# EAGLE board ac_dc (EAGLE 6.2)
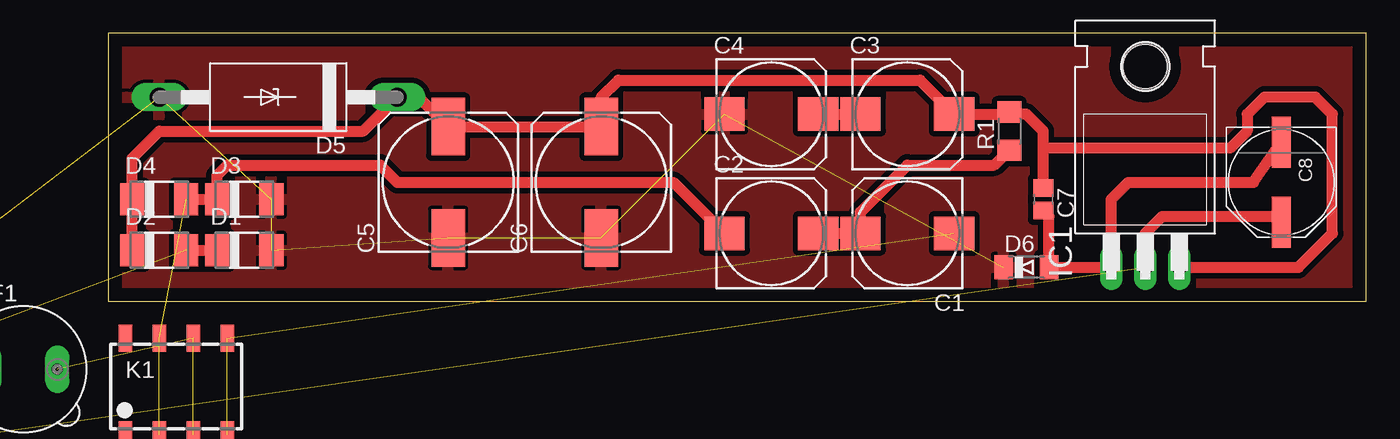
[diagram p0: board, top side]

Size 93.96 x 20 mm. Coordinates in mm from the lower left corner, seen from the top.
Outline: 0,0 93.96,0 93.96,20 0,20 0,0
Copper layers (1*16): Top 0.035mm / dielectric 1.5mm / Bottom 0.035mm
Design rules: minimum track width 10mil, minimum drill 24mil, track to track 8mil, track to pad 8mil, pad to pad 8mil, via to via 8mil, smd to smd 8mil, copper to edge 40mil, drill to drill 8mil, minimum pad ring 10mil, minimum via ring 8mil, stop-mask expansion 4mil, vias tented up to drill 0mil, thermal gap 10mil

## Footprints (pad centres in the part's own frame; a part is rotated, then mirrored left to right if it is on the bottom)
175TMP-0808 = smd 3 x 2.5: + 3.5,0; - -3.5,0
153CLV-1014 = smd 4.3 x 2.5: + 4.15,0; - -4.15,0
C0805 = smd 1.3 x 1.5: 1 -0.85,0; 2 0.85,0
PANASONIC_E = smd 3.8 x 1.4: + 3,0; - -3,0
C1206 = smd 1.6 x 1.8: 1 -1.4,0; 2 1.4,0
DO-214AC = smd 1.8 x 2.4: A 2.025,0; C -2.025,0
CB429-17 = drill 1.397 long: A 8.89,0; C -8.89,0
MINIMELF = smd 1.4 x 1.8: A 1.7,0; C -1.7,0
19560 = drill 0.813 pad 1.778 long: 1 -2.54,0; 2 2.54,0
TO220H = drill 1.118 long: 1 -2.54,-10.16; 2 0,-10.16; 3 2.54,-10.16 | hole 3.302: 0,4.826
TQFP32-08 = smd 1.27 x 0.559: 1 -4.293,2.8; 2 -4.293,2; 3 -4.293,1.2; 4 -4.293,0.4; 5 -4.293,-0.4; 6 -4.293,-1.2; 7 -4.293,-2; 8 -4.293,-2.8; 17 4.293,-2.8; 18 4.293,-2; 19 4.293,-1.2; 20 4.293,-0.4; 21 4.293,0.4; 22 4.293,1.2; 23 4.293,2; 24 4.293,2.8 | smd 0.559 x 1.27: 9 -2.8,-4.293; 10 -2,-4.293; 11 -1.2,-4.293; 12 -0.4,-4.293; 13 0.4,-4.293; 14 1.2,-4.293; 15 2,-4.293; 16 2.8,-4.293; 25 2.8,4.293; 26 2,4.293; 27 1.2,4.293; 28 0.4,4.293; 29 -0.4,4.293; 30 -1.2,4.293; 31 -2,4.293; 32 -2.8,4.293
6410-02 = drill 1.016 long: 1 1.27,0; 2 -1.27,0
G6K-2F = smd 1 x 2: 1 -3.81,-3.6; 2 -1.27,-3.6; 3 1.27,-3.6; 4 3.81,-3.6; 5 3.81,3.6; 6 1.27,3.6; 7 -1.27,3.6; 8 -3.81,3.6
R1206 = smd 1.6 x 1.803: 1 -1.422,0; 2 1.422,0
SOT23-DBV = smd 0.55 x 1.2: 1 -0.95,-1.3; 2 0,-1.3; 3 0.95,-1.3; 4 0.95,1.3; 5 -0.95,1.3

## Placement (x,y rotation side)
C1  82µ  [175TMP-0808]  59.69,5.08 180 top
C2  82µ  [175TMP-0808]  49.53,5.08 0 top
C3  82µ  [175TMP-0808]  59.69,13.97 0 top
C4  82µ  [175TMP-0808]  49.53,13.97 0 top
C5  470µ  [153CLV-1014]  25.4,8.89 90 top
C6  470µ  [153CLV-1014]  36.83,8.89 90 top
C7  220n  [C0805]  69.85,7.62 270 top
C8  100u  [PANASONIC_E]  87.63,8.89 270 top
C9  100n  [C0805]  -38.1,-22.86 0 top  (outside the outline)
C10  100n  [C0805]  -38.1,-26.67 0 top  (outside the outline)
C11  10u  [C1206]  -36.83,-31.75 0 top  (outside the outline)
D1  [DO-214AC]  10.16,3.81 0 top
D2  [DO-214AC]  3.81,3.81 0 top
D3  [DO-214AC]  10.16,7.62 0 top
D4  [DO-214AC]  3.81,7.62 0 top
D5  15KEXXC  [CB429-17]  12.7,15.24 180 top
D6  [MINIMELF]  68.58,2.54 0 top
F1  FUSE19560  [19560]  -6.35,-5.08 0 top  (outside the outline)
IC1  317T  [TO220H]  77.47,12.7 0 top
IC2  MEGA48/88/168-AU  [TQFP32-08]  -26.67,-5.08 0 top  (outside the outline)
J1  22-27-2021-02  [6410-02]  -16.51,-5.08 0 top  (outside the outline)
K1  G6K-2F  [G6K-2F]  5.08,-6.35 0 top
R1  [R1206]  67.31,12.7 90 top
U$1  TPS71530  [SOT23-DBV]  -38.1,-15.24 0 top  (outside the outline)

## Library data of the parts
C1-C11 R1 = resistor
D1-D6 = diode
F1 = fuse; MPN: 56000001009; OC_FARNELL: 1185363; OC_NEWARK: 98K6125
IC1 = linear
IC2 = avr-7
J1 = con-molex; OC_FARNELL: unknown; OC_NEWARK: unknown
K1 = relay; MF: OMRON COMPONENTS USA; MPN: G6K-2F DC24; OC_FARNELL: 1690427; OC_NEWARK: 36K7467
U$1 = ShortCircuitRobotics

## Nets
+12V: C8.+ IC1.2 U$1.4
GND: C4.- C5.- C6.- C9.2 C10.2 C11.2 D1.A D3.A D5.A D6.C IC2.3 IC2.5 IC2.21 U$1.2
N$1: C3.- C4.+
N$2: C2.- D3.C D4.A K1.2 K1.7
N$3: C1.+ C2.+ R1.1
N$4: D1.C D2.A J1.2
N$5: C3.+ C5.+ C6.+ C7.1 D2.C D4.C D5.C IC1.3 R1.2
N$6: C1.- K1.4 K1.5
N$8: F1.2 K1.3 K1.6
N$9: F1.1 J1.1
N$10: C7.2 C8.- D6.A IC1.1
VCC: C9.1 C10.1 C11.1 IC2.4 IC2.6 IC2.18 IC2.20 U$1.5

## Tracks (layer width: path | path; a pad name or v marks a point on that pad's centre or on a via)
+12V  (1 unrouted)
  Top 0.813: IC1.2 77.47,5.08 78.74,6.35 87.17,6.35 C8.+
GND  (13 unrouted)
  pour Top (isolate 0.406): 0,0 0,20.32 93.98,20.32 93.98,0
N$1
  Top 0.813: C4.+ C3.-
N$2  (2 unrouted)
  Top 0.813: D4.A D3.C 8.13,9.4 8.89,10.16 20.32,10.16 21.59,8.89 42.22,8.89 C2.-
N$3
  Top 0.813: C2.+ C1.+ 56.19,6.66 59.69,10.16 66.19,10.16 R1.1
N$4  (1 unrouted)
  Top 0.813: D2.A D1.C
N$5
  Top 0.813: D2.C D4.C 1.78,10.68 3.81,12.7 19.05,12.7 D5.C 23.2,15.24 C5.+ C6.+ 36.83,15.24 38.1,16.51 60.65,16.51 C3.+ 67.16,13.97 | 67.16,13.97 R1.2 | C7.1 69.85,11.43 | 69.85,11.43 69.85,12.7 68.58,13.97 67.16,13.97 | IC1.3 88.9,2.54 91.44,5.08 91.44,13.97 90.17,15.24 86.36,15.24 85.09,13.97 85.09,12.7 83.82,11.43 69.85,11.43
N$6  (2 unrouted)
N$8  (2 unrouted)
N$9  (1 unrouted)
N$10
  Top 0.813: C7.2 70.28,6.34 D6.A IC1.1 74.93,7.62 76.2,8.89 85.55,8.89 C8.-
VCC  (7 unrouted)